# Altium PCB CAN_HUB.PcbDoc
Units mm, origin at the board's own origin, x right, y up, seen from the top; angles counter-clockwise.
Board outline 41.91 x 20 mm, 2 copper layers (Top Layer, Bottom Layer); 8 components, 4 nets, 34 pads, 0 vias.
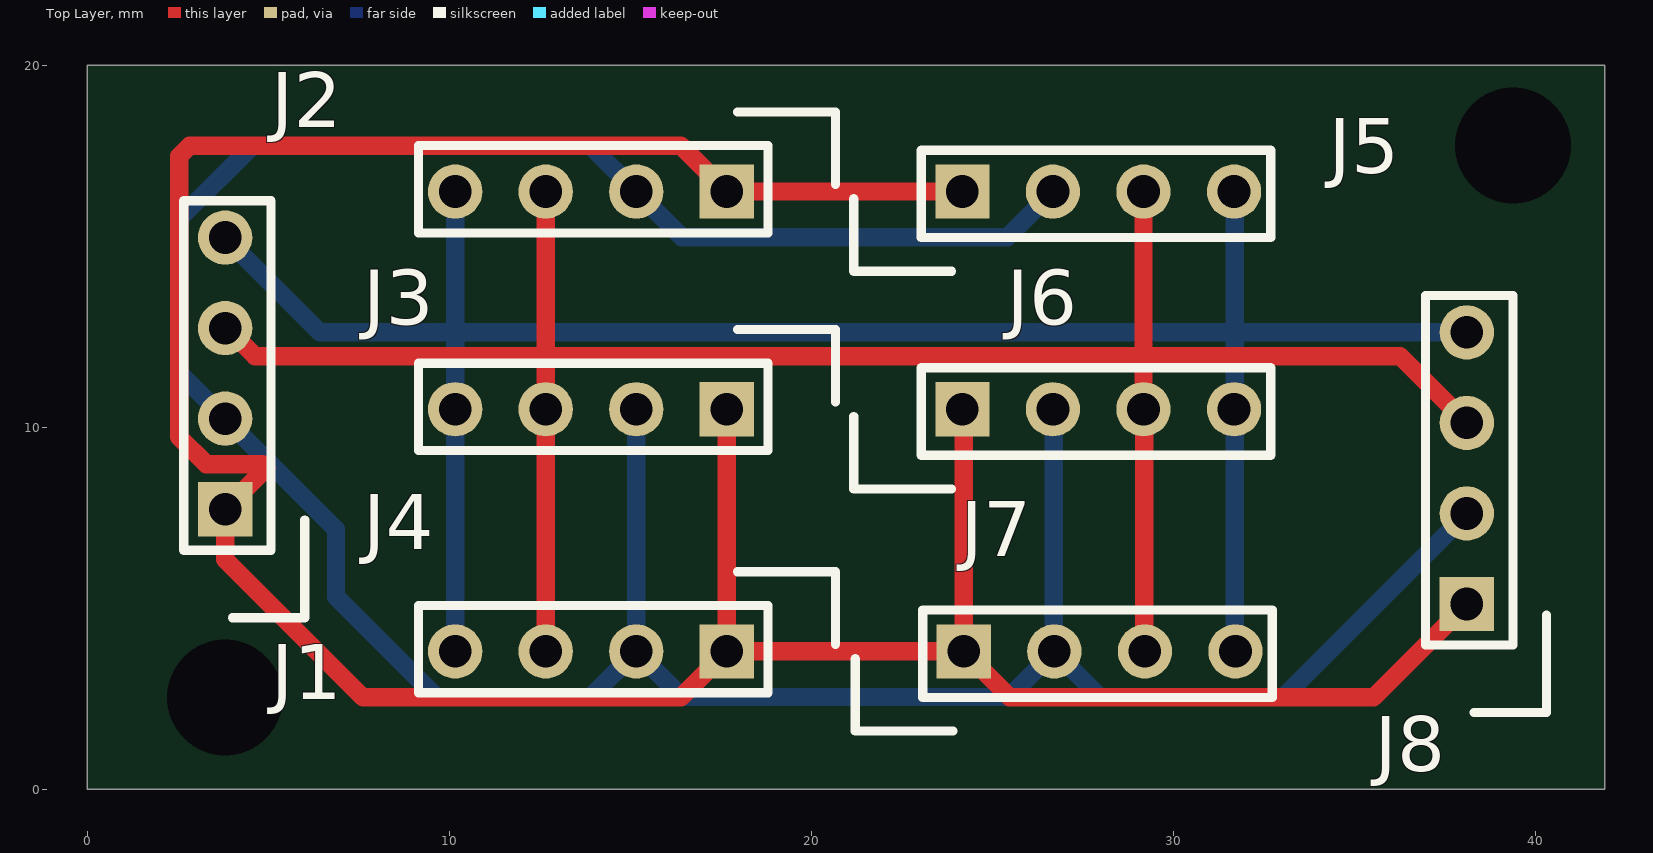
[diagram p0: Top Layer view]
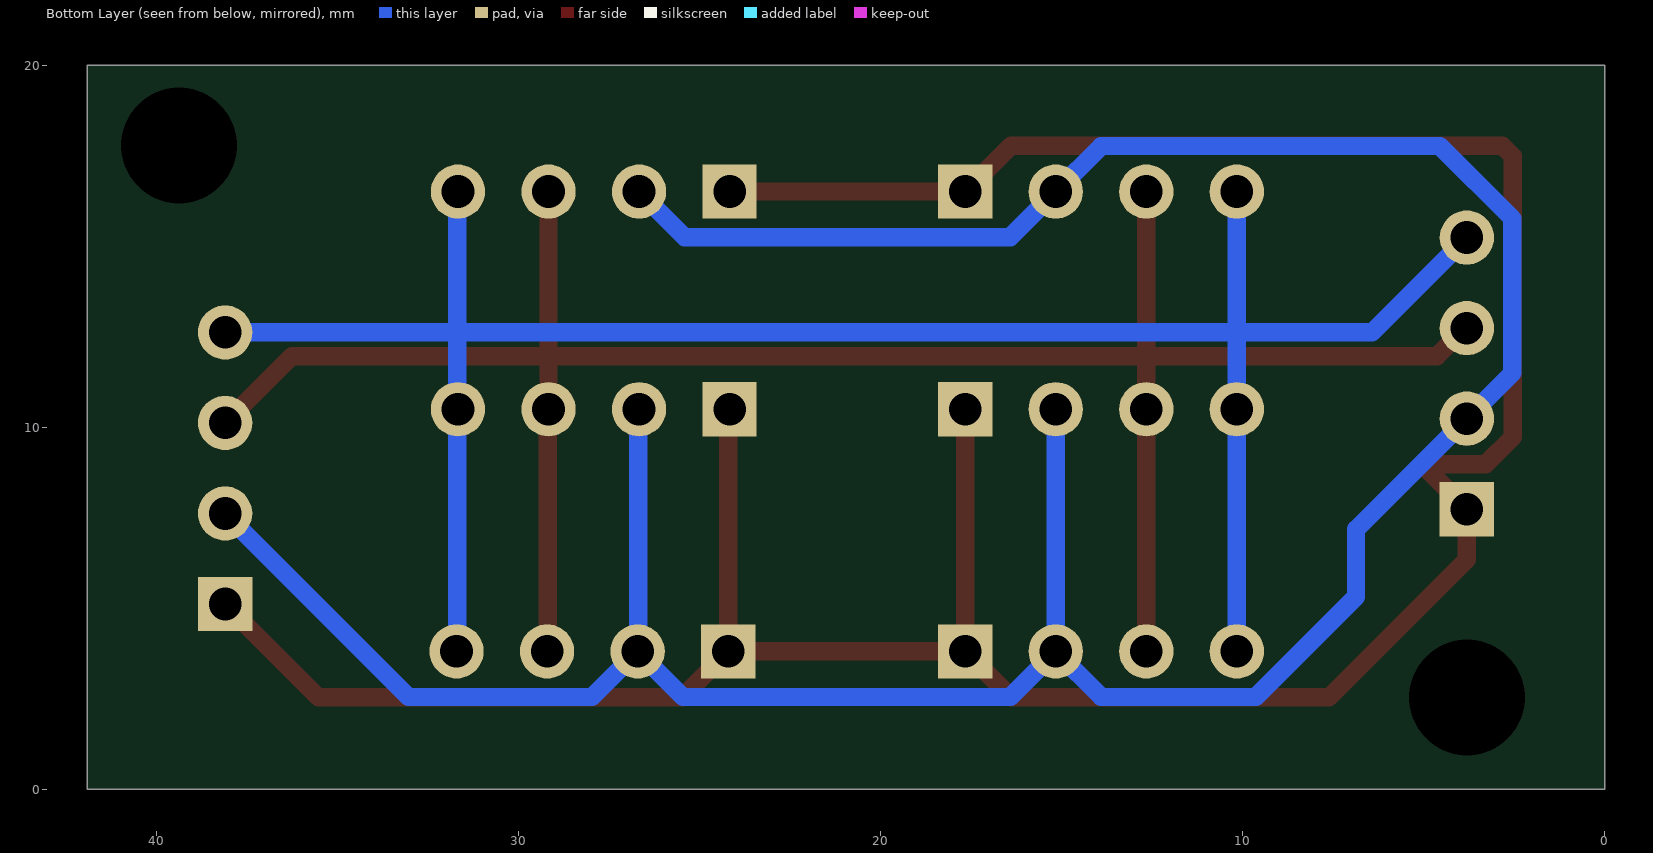
[diagram p1: Bottom Layer view, seen from below]

## Layer stack, top to bottom
Top Solder: solder mask 0.0102, Solder Resist, Dk 3.5
Top Layer: signal copper 0.0356
Dielectric 1: dielectric 0.32, FR-4, Dk 4.8
Bottom Layer: signal copper 0.0356
Bottom Solder: solder mask 0.0102, Solder Resist, Dk 3.5

## Board outline
0,0 41.91,0 41.91,20 0,20

## Design rules (kind name [scope] priority, off if disabled: settings)
Clearance [All] p1: gap=0.254 ignorepadtopadclearanceinfootprint=FALSE except(0: Arc-Hole Track-Hole SMDPad-Hole THPad-Hole Via-Hole Fill-Hole Poly-Hole Region-Hole Text-Hole)
PolygonConnect [All] p1: connectstyle=Relief reliefconductorwidth=0.254 reliefentries=4 polygonreliefangle="90 Angle" airgapwidth=0.254
RoomDefinition CAN_HUB [InComponentClass('CAN_HUB')] p1: confinementstyle=ConfineIn formatcopy=TRUE lockcomponents=FALSE outline 0,0 45,0 45,20 0,20
RoutingVias [All] p1: holewidth=0.711 width=1.27 viastyle="Through Hole" minholewidth=0.711 minwidth=1.27 maxholewidth=0.711 maxwidth=1.27
SolderMaskExpansion [All] p1: expansion=0.102 istentingtop=FALSE
Width [All] p1: maxlimit=1 minlimit=0.254 preferedwidth=0.254 minimp=50.000000 maximp=50.000000 favimp=50.000000
30 further rules are at their usual default settings.

## Classes and differential pairs
component class CAN_HUB: J1 J2 J3 J5 J6 J7 J8

## Components (designator, comment, footprint, x,y, rotation, side; value= is the part's Value field where it differs from the comment)
J1 "B4B-EH-A" "JST connector" 3.81,15.24 r270 top
J2 "B4B-EH-A" "JST connector" 10.162,16.51 r0 top
J3 "B4B-EH-A" "JST connector" 10.162,10.5 r0 top
J4 "B4B-EH-A" "JST connector" 10.162,3.81 r0 top
J5 "B4B-EH-A" "JST CONNECTOR" 31.67,16.51 r180 top
J6 "B4B-EH-A" "JST connector" 31.67,10.5 r180 top
J7 "B4B-EH-A" "JST connector" 31.71,3.81 r180 top
J8 "B4B-EH-A" "JST connector" 38.1,12.62 r270 top

## Footprints (in the part's own frame and the unit in brackets; to place one, negate y for a bottom-side part, rotate by r counter-clockwise, add the part's x,y. Pads: shape width x height; smd on the part's side, far side on the other; paste and mask are expansions set on the pad)
"JST connector" [mm]
  rect 1.5x1.5 hole 0.9: 1(7.5,0)
  round 1.5 hole 0.9: 2(5,0) 3(2.5,0) 4(0,0)
  silkscreen extent -1.02,-1.14 10.5,2.2, body extent -2.44,-1.9 10.06,1.9, height 6
"JST CONNECTOR" [mm]
  rect 1.5x1.5 hole 0.9: 1(7.5,0)
  round 1.5 hole 0.9: 2(5,0) 3(2.5,0) 4(0,0)
  silkscreen extent -1.02,-1.14 10.5,2.2, body extent -2.44,-1.9 10.06,1.9, height 6

## Part data
J1 J2 J3 J4 J5 J6 J7 J8: library part MHDR1X4, "Header, 4-Pin", LatestRevisionDate=17-Jul-2002, LatestRevisionNote="Re-released for DXP Platform.", Publisher="Altium Limited"

## Free pads (board coordinates)
  round 1.778 hole 3.2: 17(3.81,2.54) 17(39.37,17.78)

## Nets (pads, with @x,y where several pads share a name; then routed paths per layer and width w, separated by ;. In a path a pad name is that pad's centre, name@x,y a point inside that pad or via, vN(x,y) a via of type N, cw(c..) or ccw(c..) an arc to the next point about the centre after c; other vN are vias at no path point)
5V: J1.1 J2.1 J3.1 J4.1 J5.1 J6.1 J7.1 J8.1 | length 87.2
  Top Layer w0.254: J6.1 J6.1@24.21,10.46
  Top Layer w0.508: J3.1 J4.1 ; J5.1 J2.1 16.392,17.78 2.838,17.78 2.54,17.482 2.54,9.731 3.289,8.982 4.83,8.982 4.941,8.871 J1.1 3.81,6.35 7.62,2.54 16.392,2.54 J4.1 ; J6.1@24.21,10.46 J7.1 ; J8.1 35.52,2.54 25.48,2.54 J7.1 ; J4.1 J7.1
GND: J1.2 J2.2 J3.2 J4.2 J5.2 J6.2 J7.2 J8.2 | length 88.7
  Bottom Layer w0.508: J3.2 J4.2 ; J6.2 26.69,10.48 26.69,3.83 J7.2 ; J5.2 25.412,15.252 16.42,15.252 J2.2 13.904,17.768 4.559,17.768 2.552,15.761 2.552,11.498 J1.2 6.871,7.179 6.871,5.322 9.641,2.552 13.904,2.552 J4.2 ; J8.2 33.032,2.552 27.968,2.552 J7.2 ; J4.2 16.42,2.552 25.452,2.552 J7.2
NetJ1_3: J1.3 J2.3 J3.3 J4.3 J5.3 J6.3 J7.3 J8.3 | length 60.8
  Top Layer w0.254: J1.3 J1.3@3.861,12.74 ; J6.3 J6.3@29.19,10.48 ; J7.3@29.19,3.83 J7.3
  Top Layer w0.508: J1.3@3.861,12.74 4.635,11.966 12.662,11.966 ; J4.3 J3.3 12.662,11.966 ; J2.3 12.662,11.966 ; J6.3 29.17,11.966 ; J5.3 29.17,11.966 ; J7.3@29.19,3.83 J6.3@29.19,10.48 ; J8.3 36.254,11.966 29.17,11.966 ; 12.662,11.966 29.17,11.966
NetJ1_4: J1.4 J2.4 J3.4 J4.4 J5.4 J6.4 J7.4 J8.4 | length 60.8
  Bottom Layer w0.254: J5.4 J5.4@31.69,16.49 ; J7.4@31.69,3.83 J7.4
  Bottom Layer w0.508: J1.4 6.43,12.62 10.162,12.62 ; J4.4 J3.4 10.162,12.62 ; J2.4 10.162,12.62 ; J7.4@31.69,3.83 31.69,12.62 ; J5.4@31.69,16.49 31.69,12.62 ; J8.4 31.69,12.62 ; 10.162,12.62 31.69,12.62